# Altium PCB PCBv2.PcbDoc
Units mm, origin at the board's own origin, x right, y up, seen from the top; angles counter-clockwise.
Board outline 152.4 x 101.6 mm, 2 copper layers (Top Layer, Bottom Layer); 49 components, 33 nets, 199 pads, 0 vias.
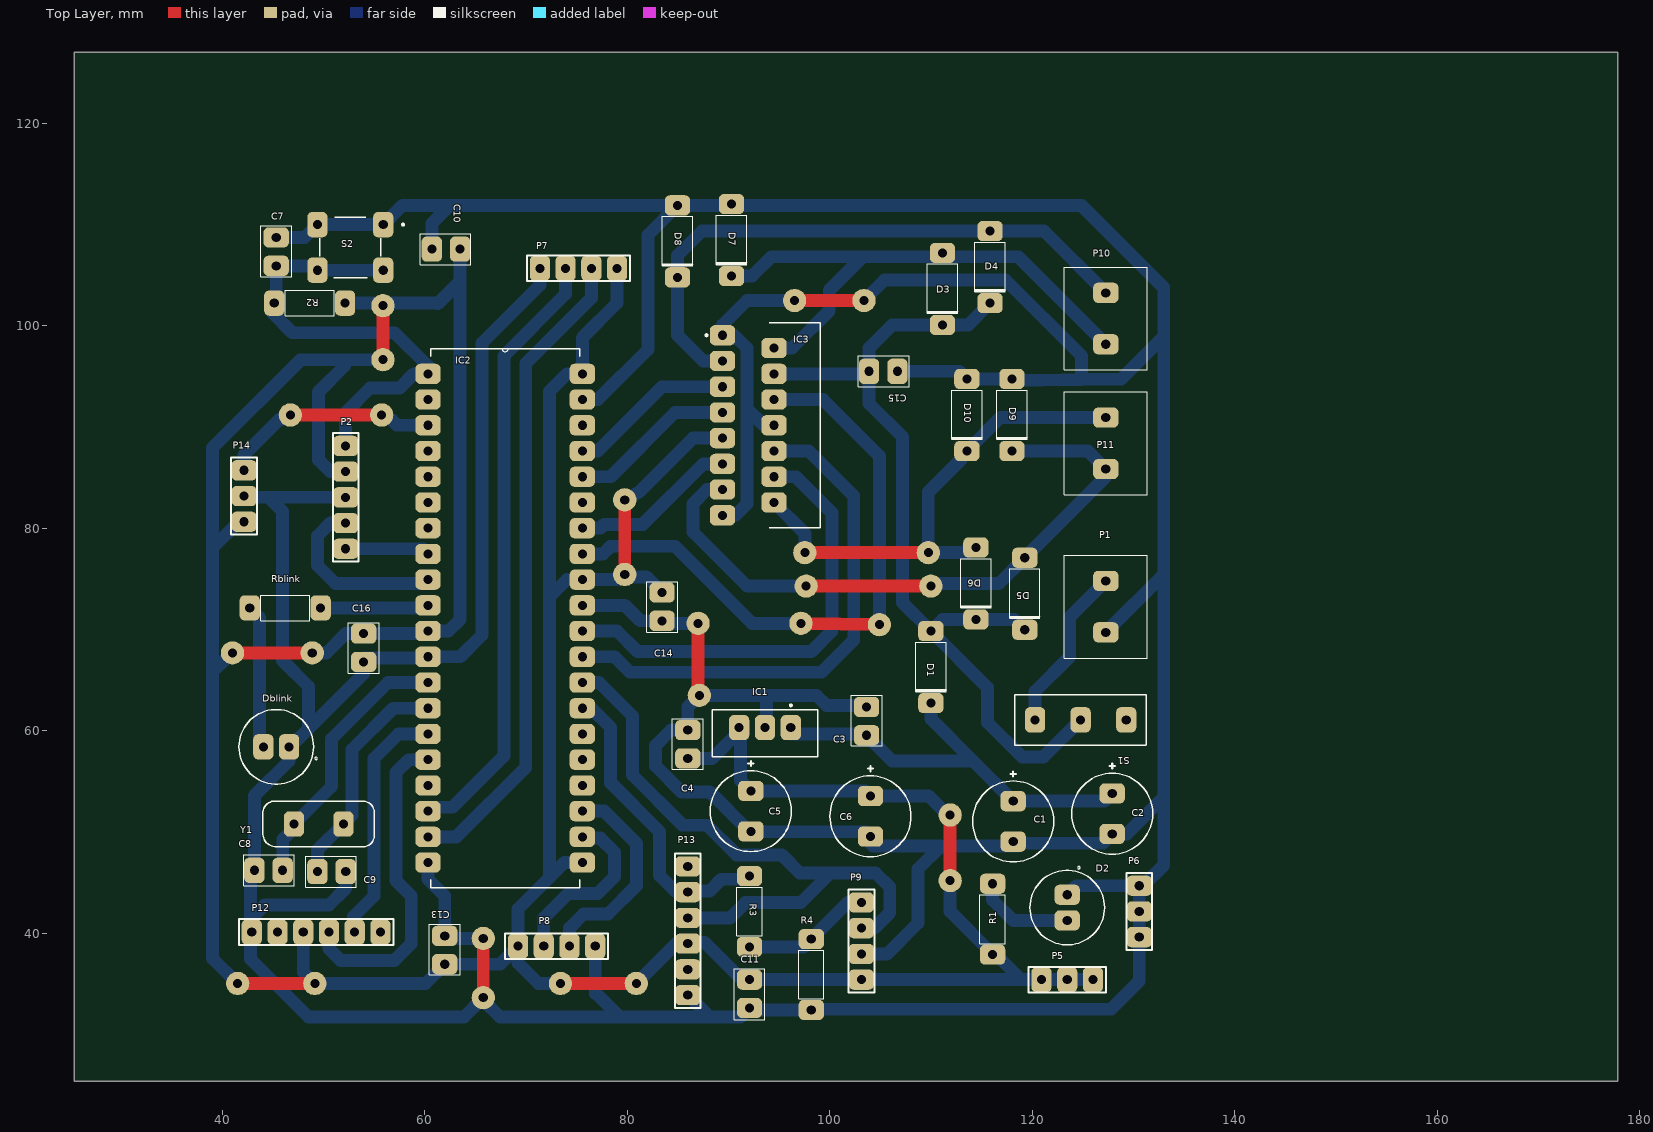
[diagram p0: Top Layer view]
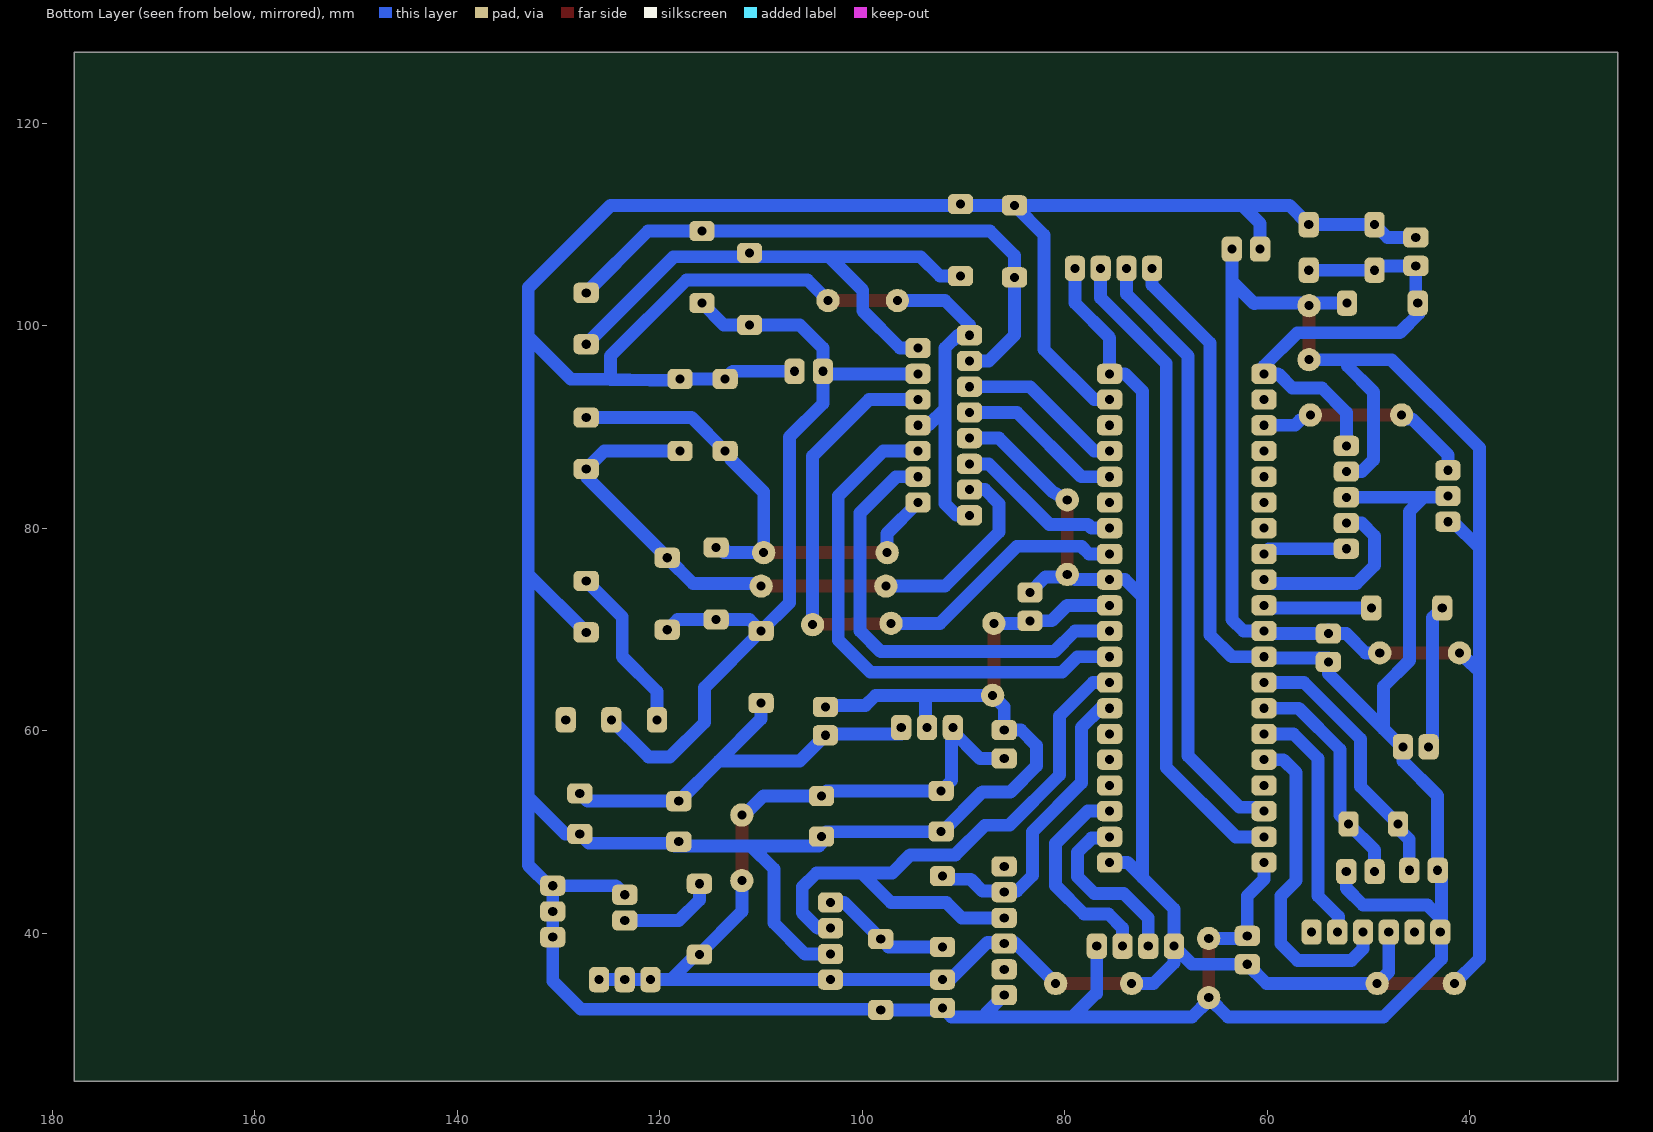
[diagram p1: Bottom Layer view, seen from below]

## Layer stack, top to bottom
Top Solder: solder mask 0.0102, Solder Resist, Dk 3.5
Top Layer: signal copper 0.0356
Dielectric 1: dielectric 0.32, FR-4, Dk 4.8
Bottom Layer: signal copper 0.0356
Bottom Solder: solder mask 0.0102, Solder Resist, Dk 3.5

## Board outline
25.4,25.4 177.8,25.4 177.8,127 25.4,127

## Design rules (kind name [scope] priority, off if disabled: settings)
Clearance [All] p1: gap=0.254 ignorepadtopadclearanceinfootprint=FALSE except(0: Arc-Hole Track-Hole SMDPad-Hole THPad-Hole Via-Hole Fill-Hole Poly-Hole Region-Hole Text-Hole)
PolygonConnect [All] p1: connectstyle=Relief reliefconductorwidth=0.254 reliefentries=4 polygonreliefangle="90 Angle" airgapwidth=0.254
RoutingVias [All] p1: holewidth=0.711 width=1.27 viastyle="Through Hole" minholewidth=0.711 minwidth=1.27 maxholewidth=0.711 maxwidth=1.27
SolderMaskExpansion [All] p1: expansion=0.102
Width [All] p1: maxlimit=1.27 minlimit=1.27 preferedwidth=1.27
30 further rules are at their usual default settings.

## Components (designator, comment, footprint, x,y, rotation, side; value= is the part's Value field where it differs from the comment)
C1 "Cap Pol1" elektrolit 118.11,51.054 r270 top value=470uF
C2 "Cap Pol1" elektrolit 127.889,51.816 r270 top value=470uF
C3 "Cap" keramicki 103.759,60.963 r270 top value=100nF
C4 "Cap" keramicki 86.106,58.671 r270 top value=100nF
C5 "Cap Pol1" elektrolit 92.202,52.07 r270 top value=470uF
C6 "Cap Pol1" elektrolit 104.013,51.562 r270 top value=470uF
C7 "Cap" keramicki 45.466,107.315 r270 top value=100nF
C8 "Cap" keramicki 44.577,46.101 r180 top value=33pF
C9 "Cap" keramicki 50.8,46.228 r0 top value=33pF
C10 "Cap" keramicki 62.103,107.696 r0 top value=100nF
C11 "Cap" keramicki 91.948,34.033 r90 top value=100nF
C13 "Cap" keramicki 62.103,38.357 r270 top value=100nF
C14 "Cap" keramicki 83.312,72.263 r90 top value=100nF
C15 "Cap" keramicki 105.283,95.377 r180 top value=100nF
C16 "Cap" keramicki 53.848,68.202 r90 top value=100nF
D1 "1N4007" DIOD 109.982,66.294 r270 top
D2 "LED0" led 123.444,42.545 r270 top
D3 "Diode 1N4007" DIOD 111.125,103.632 r270 top
D4 "Diode 1N4007" DIOD 115.824,105.791 r270 top
D5 "Diode 1N4007" DIOD 119.253,73.533 r270 top
D6 "Diode 1N4007" DIOD 114.427,74.549 r270 top
D7 "Diode 1N4007" DIOD 90.297,108.458 r270 top
D8 "Diode 1N4007" DIOD 84.963,108.331 r270 top
D9 "Diode 1N4007" DIOD 117.983,91.186 r270 top
D10 "Diode 1N4007" DIOD 113.538,91.186 r270 top
Dblink "LED0" led 45.339,58.42 r180 top
IC1 "L7805" stabilizator 96.149,60.325 r180 top
IC2 "dspic30f4013" dspic 75.565,46.99 r0 top
IC3 "L298N" l298n 89.408,99.06 r0 top
P1 "power" terminal2 127.254,74.803 r270 top
P2 "Programator" HDR1X5 52.197,88.138 r270 top
P5 "5V" HDR1X3 125.984,35.433 r180 top
P6 "GND" HDR1X3 130.556,39.624 r90 top
P7 "HC-SR04" HDR1X4 78.994,105.664 r180 top
P8 "HC-SR04" HDR1X4 69.215,38.735 r0 top
P9 "Bluetooth" HDR1X4 103.124,35.433 r90 top
P10 "motor1" terminal2 127.254,98.171 r90 top
P11 "motor2" terminal2 127.254,85.852 r90 top
P12 "FT232" HDR1X6 55.626,40.132 r180 top
P13 "FT232" HDR1X6 85.979,46.609 r270 top
P14 "Sharp" HDR1X3 42.164,80.645 r90 top
R1 "Res1" otp 116.078,41.402 r270 top value=510
R2 "Res1" otp 48.641,102.235 r0 top value=10K
R3 "Res1" otp 92.075,42.164 r90 top value=4K7
R4 "Res1" otp 98.171,35.941 r90 top value=10K
Rblink "Res1" otp 46.228,72.136 r0 top value=510
S1 "SW-SPST" Prekidac 120.269,61.087 r0 top
S2 "SW-PB" taster 52.653,107.732 r180 top
Y1 "XTAL" oscilator 49.53,50.8 r180 top

## Footprints (in the part's own frame and the unit in brackets; to place one, negate y for a bottom-side part, rotate by r counter-clockwise, add the part's x,y. Pads: shape width x height; smd on the part's side, far side on the other; paste and mask are expansions set on the pad)
DIOD [mm]
  rrect50% 2x2.5 hole 0.9: 1(-3.556,0) 2(3.556,0)
  silkscreen extent -2.46,-1.5 2.41,1.5
dspic [mm]
  rrect50% 2.5x2 hole 0.9: 1(-15.24,48.26) 2(-15.24,45.72) 3(-15.24,43.18) 4(-15.24,40.64) 5(-15.24,38.1) 6(-15.24,35.56) 7(-15.24,33.02) 8(-15.24,30.48) 9(-15.24,27.94) 10(-15.24,25.4) 11(-15.24,22.86) 12(-15.24,20.32) 13(-15.24,17.78) 14(-15.24,15.24) 15(-15.24,12.7) 16(-15.24,10.16) 17(-15.24,7.62) 18(-15.24,5.08) 19(-15.24,2.54) 20(-15.24,0) 21(0,0) 22(0,2.54) 23(0,5.08) 24(0,7.62) 25(0,10.16) 26(0,12.7) 27(0,15.24) 28(0,17.78) 29(0,20.32) 30(0,22.86) 31(0,25.4) 32(0,27.94) 33(0,30.48) 34(0,33.02) 35(0,35.56) 36(0,38.1) 37(0,40.64) 38(0,43.18) 39(0,45.72) 40(0,48.26)
  silkscreen extent -14.99,-2.49 -0.25,50.75
elektrolit [mm]
  rrect50% 2x2.5 hole 0.9: 1(-2,0) 2(2,0)
  silkscreen extent -4.95,-4 4,4
HDR1X3 [mm] "Connector; Header; 3 Position"
  rrect50% 2x2.5 hole 0.9: 1(0,0) 2(2.54,0) 3(5.08,0)
  silkscreen extent -1.27,-1.27 6.35,1.27
HDR1X4 [mm] "Connector; Header; 4 Position"
  rrect50% 2x2.5 hole 0.9: 1(0,0) 2(2.54,0) 3(5.08,0) 4(7.62,0)
  silkscreen extent -1.27,-1.27 8.89,1.27
HDR1X5 [mm] "Connector; Header; 5 Position"
  rrect50% 2x2.5 hole 0.9: 1(0,0) 2(2.54,0) 3(5.08,0) 4(7.62,0) 5(10.16,0)
  silkscreen extent -1.27,-1.27 11.43,1.27
HDR1X6 [mm] "Connector; Header; 6 Position"
  rrect50% 2x2.5 hole 0.9: 1(0,0) 2(2.54,0) 3(5.08,0) 4(7.62,0) 5(10.16,0) 6(12.7,0)
  silkscreen extent -1.27,-1.27 13.97,1.27
keramicki [mm]
  rrect50% 2x2.5 hole 0.9: 1(-1.4,-0.127) 2(1.4,-0.127)
  silkscreen extent -2.54,-1.65 2.46,1.4
l298n [mm]
  rrect50% 2.5x2 hole 0.9: 1(0,0) 2(5.08,-1.27) 3(0,-2.54) 4(5.08,-3.81) 5(0,-5.08) 6(5.08,-6.35) 7(0,-7.62) 8(5.08,-8.89) 9(0,-10.16) 10(5.08,-11.43) 11(0,-12.7) 12(5.08,-13.97) 13(0,-15.24) 14(5.08,-16.51) 15(0,-17.78)
  silkscreen extent -1.69,-18.99 9.63,1.21
led [mm]
  rrect50% 2x2.5 hole 0.9: 1(1.27,0) 2(-1.27,0)
  silkscreen extent -4.06,-3.68 3.68,3.68
oscilator [mm]
  rrect50% 2x2.5 hole 0.9: 1(-2.44,0) 2(2.44,0)
  silkscreen extent -5.5,-2.25 5.5,2.25
otp [mm]
  rrect50% 2x2.5 hole 0.9: 1(-3.5,0) 2(3.5,0)
  silkscreen extent -2.41,-1.25 2.41,1.25
Prekidac [mm]
  rrect50% 2x2.5 hole 0.9: 1(0,0) 2(4.5,0) 3(9,0)
  silkscreen extent -2,-2.5 11,2.5
stabilizator [mm]
  rrect50% 2x2.5 hole 0.9: 1(0,0) 2(2.55,0) 3(5.1,0)
  silkscreen extent -2.65,-2.29 7.75,2.86
taster [mm]
  rrect50% 2x2.5 hole 0.9: 1(-3.25,-2.25) 1(3.25,-2.25) 2(-3.25,2.25) 2(3.25,2.25)
  silkscreen extent -5.31,-3 3,3
terminal2 [mm]
  rrect50% 2x2.5 hole 0.9: 1(0,0) 2(5.08,0)
  silkscreen extent -2.54,-4.1 7.62,4.1

## Part data
C1 C2 C5 C6: "Polarized Capacitor (Radial)", LatestRevisionDate=17-Jul-2002, LatestRevisionNote="Re-released for DXP Platform.", PackageDescription="Polarized Capacitor (Radial); 2 Leads", PackageReference=RB7.6-15, Published=8-Jun-2000, Publisher="Altium Limited"
C3 C4 C7 C8 C9 C10 C11 C13 C14 C15 C16: "Capacitor", LatestRevisionDate=17-Jul-2002, LatestRevisionNote="Re-released for DXP Platform.", PackageDescription="Radial Cap, Thru-Hole; 2 Leads; 0.3 in Pin Spacing", PackageReference=RAD-0.3, Published=8-Jun-2000, Publisher="Altium Limited"
D1: library part "Diode 1N4007", "1 Amp General Purpose Rectifier", Code_JEDEC=DO-204-AL, ComponentLink1Description="Manufacturer Link", ComponentLink1URL=http://www.fairchildsemi.com/, ComponentLink2Description=Datasheet, ComponentLink2URL=http://www.fairchildsemi.com/ds/1N%2F1N4001.pdf, DatasheetVersion=1998, LatestRevisionDate=17-Jul-2002, LatestRevisionNote="Re-released for DXP Platform.", PackageDescription="Diode, Axial; Body 5.2 x 2.7 mm (LxDia. max), Lead Dia. 0.86 mm (max)", PackageReference=DO-41, PackageVersion=Aug-1999, Published=8-Jun-2000, Publisher="Altium Limited"
D2 Dblink: "Typical INFRARED GaAs LED", LatestRevisionDate=08-Jul-2005, LatestRevisionNote="Mech Layer 1 removed.", PackageDescription="LED; 2 Leads", PackageReference=LED-0, Published=8-Jun-2000, Publisher="Altium Limited"
D3 D4 D5 D6 D7 D8 D9 D10: "1 Amp General Purpose Rectifier", Code_JEDEC=DO-204-AL, ComponentLink1Description="Manufacturer Link", ComponentLink1URL=http://www.fairchildsemi.com/, ComponentLink2Description=Datasheet, ComponentLink2URL=http://www.fairchildsemi.com/ds/1N%2F1N4001.pdf, DatasheetVersion=1998, LatestRevisionDate=17-Jul-2002, LatestRevisionNote="Re-released for DXP Platform.", PackageDescription="Diode, Axial; Body 5.2 x 2.7 mm (LxDia. max), Lead Dia. 0.86 mm (max)", PackageReference=DO-41, PackageVersion=Aug-1999, Published=8-Jun-2000, Publisher="Altium Limited"
IC3: "Dual Full Bridge Motor Driver 15-Pin(15+Tab) MULTIWATT V Tube", Package=None, Availability=Unavailable, MP=L298N, Price=None
P1 P10 P11: library part "Header 2", "Header, 2-Pin", LatestRevisionDate=17-Jul-2002, LatestRevisionNote="Re-released for DXP Platform.", Publisher="Altium Limited"
P2 P5 P6 P9 P12 P13: library part "Header 6", "Header, 6-Pin", LatestRevisionDate=17-Jul-2002, LatestRevisionNote="Re-released for DXP Platform.", Publisher="Altium Limited"
P7 P8: library part "Header 4", "Header, 4-Pin", LatestRevisionDate=17-Jul-2002, LatestRevisionNote="Re-released for DXP Platform.", Publisher="Altium Limited"
P14: library part "Header 3", "Header, 3-Pin", LatestRevisionDate=17-Jul-2002, LatestRevisionNote="Re-released for DXP Platform.", Publisher="Altium Limited"
R1 R2 R3 R4 Rblink: "Resistor", LatestRevisionDate=17-Jul-2002, LatestRevisionNote="Re-released for DXP Platform.", PackageDescription="Axial Device, Thru-Hole; 2 Leads; 0.3 in Pin Spacing", PackageReference=AXIAL-0.3, Published=8-Jun-2000, Publisher="Altium Limited"
S1: "Single-Pole, Single-Throw Switch", LatestRevisionDate=17-Jul-2002, LatestRevisionNote="Re-released for DXP Platform.", PackageDescription="Switch; 2 Leads", PackageReference=SPST-2, Published=24-Mar-1999, Publisher="Altium Limited"
S2: "Switch", LatestRevisionDate=17-Jul-2002, LatestRevisionNote="Re-released for DXP Platform.", PackageDescription="Switch; 2 Leads", PackageReference=SPST-2, Published=24-Mar-1999, Publisher="Altium Limited"
Y1: "Crystal Oscillator", LatestRevisionDate=17-Jul-2002, LatestRevisionNote="Re-released for DXP Platform.", PackageDescription="Crystal, Thru-Hole; 2 Leads; Body 3.1 x 8.2 mm (Dia.xH)", PackageReference=R38, Published=8-Jun-2000, Publisher="Altium Limited"

## Free pads (board coordinates)
  round 2.3 hole 0.9: 2(41.021,67.691) 2(41.529,35.052) 2(46.736,91.186) 2(48.895,67.691) 2(49.149,35.052) 2(55.753,91.186) 2(55.88,96.647) 2(55.88,101.981) 2(65.786,33.655) 2(65.786,39.497) 2(73.406,35.052) 2(79.756,75.438) 2(79.756,82.804) 2(80.899,35.052) 2(86.995,70.612) 2(87.122,63.5) 2(96.52,102.489) 2(97.155,70.612) 2(97.536,77.597) 2(97.663,74.295) 2(103.378,102.489) 2(104.902,70.485) 2(109.728,77.597) 2(109.982,74.295) 2(111.887,45.212) 2(111.887,51.689)

## Nets (pads, with @x,y where several pads share a name; then routed paths per layer and width w, separated by ;. In a path a pad name is that pad's centre, name@x,y a point inside that pad or via, vN(x,y) a via of type N, cw(c..) or ccw(c..) an arc to the next point about the centre after c; other vN are vias at no path point)
5V: C4.2 C5.1 C6.1 C10.2 C11.2 C13.2 C14.2 C16.2 IC1.3 IC2.11 IC2.21 IC2.32 IC2.40 IC3.9 P2.2 P5.1 P5.2 P5.3 P7.1 P8.1 P9.1 P12.4 P13.4 P14.1 pad.2@41.021,67.691 pad.2@41.529,35.052 pad.2@48.895,67.691 pad.2@49.149,35.052 pad.2@55.88,96.647 pad.2@55.88,101.981 pad.2@73.406,35.052 pad.2@79.756,75.438 pad.2@79.756,82.804 pad.2@80.899,35.052 pad.2@111.887,45.212 pad.2@111.887,51.689 R1.2 R2.2 | length 431.1
  Top Layer w1.27: pad.2@41.021,67.691 pad.2@48.895,67.691 ; pad.2@41.529,35.052 pad.2@49.149,35.052 ; pad.2@55.88,96.647 pad.2@55.88,101.981 ; pad.2@73.406,35.052 pad.2@80.899,35.052 ; pad.2@79.756,75.438 pad.2@79.756,82.804 ; pad.2@111.887,45.212 pad.2@111.887,51.689
  Bottom Layer w1.27: pad.2@41.021,67.691 39.052,65.916 ; pad.2@41.529,35.052 39.052,37.529 39.052,65.916 ; P14.1 41.656,80.645 39.052,78.041 ; P12.4 48.006,36.195 49.149,35.052 60.071,35.052 C13.2 67.437,36.957 P8.1 ; pad.2@48.895,67.691 50.292,67.691 52.203,69.602 C16.2 ; 52.07,96.266 52.07,96.012 49.53,93.472 49.53,86.741 50.673,85.598 P2.2 ; R2.2 61.214,102.235 61.279,102.17 63.503,104.394 ; C16.2@53.975,69.98 54.359,69.596 60.071,69.596 IC2.11 62.357,69.85 63.5,70.993 63.5,96.774 63.503,96.777 63.503,104.394 ; pad.2@55.88,96.647 47.752,96.647 39.052,87.947 39.052,78.041 ; C10.2 63.503,104.394 ; pad.2@73.279,35.179 73.406,35.052 71.247,35.052 69.215,37.084 P8.1 ; IC2.21 73.787,46.99 72.326,45.529 ; P7.1 78.994,102.235 75.565,98.806 IC2.40 74.041,95.25 72.326,93.535 72.326,73.215 ; pad.2@79.756,82.804 81.153,83.566 86.487,88.9 IC3.9 IC3.9@89.281,88.773 ; pad.2@80.899,35.052 84.963,39.116 87.63,39.116 91.313,35.433 C11.2 P9.1 118.872,35.433 ; C14.2 81.918,75.184 79.828,75.184 79.756,75.438 78.994,74.93 IC2.32 74.041,74.93 72.326,73.215 ; C4.2 88.386,57.271 91.186,60.071 91.186,55.086 C5.1 103.505,54.07 C6.1 109.76,53.562 pad.2@111.76,51.562 ; pad.2@111.887,44.958 111.887,42.164 116.078,37.973 R1.2 116.403,37.902 118.872,35.433 ; P5.1 P5.2 P5.3 118.872,35.433 ; 39.052,65.916 39.052,78.041 ; P8.1 69.215,42.418 72.326,45.529 ; 72.326,45.529 72.326,73.215
EnA: IC2.33 IC3.6 pad.2@97.155,70.612 pad.2@104.902,70.485 | length 62.2
  Top Layer w1.27: pad.2@97.155,70.612 pad.2@104.902,70.485
  Bottom Layer w1.27: IC2.33 77.597,77.47 78.359,78.232 84.709,78.232 92.329,70.612 pad.2@97.155,70.612 ; IC3.6 99.314,92.71 104.902,87.122 pad.2@104.902,70.485
EnB: IC2.34 IC3.11 | length 16.5
  Bottom Layer w1.27: IC2.34 77.343,80.01 77.724,80.391 81.534,80.391 87.503,86.36 IC3.11
GND: C1.2 C2.2 C3.1 C4.1 C5.2 C6.2 C7.1 C8.2 C9.2 C10.1 C11.1 C13.1 C14.1 C15.1 C16.1 D2.2 D7.1 D8.1 D9.1 D10.1 Dblink.2 IC1.2 IC2.12 IC2.20 IC2.31 IC2.39 IC3.1 IC3.8 IC3.15 P1.2 P2.3 P6.1 P6.2 P6.3 P7.4 P8.4 P9.2 P12.6 P13.6 P14.2 pad.2@65.786,33.655 pad.2@65.786,39.497 pad.2@86.995,70.612 pad.2@87.122,63.5 pad.2@96.52,102.489 pad.2@103.378,102.489 R4.1 S2.1 | length 676.6
  Top Layer w1.27: pad.2@65.786,33.655 pad.2@65.786,39.497 ; pad.2@86.995,70.612 86.995,63.373 pad.2@87.122,63.5 ; pad.2@96.52,102.489 pad.2@103.378,102.489
  Bottom Layer w1.27: P14.2 42.291,83.058 44.577,83.058 ; C7.1 48.136,108.715 49.403,109.982 55.903,109.982 57.808,111.887 62.484,111.887 ; P2.3 44.577,83.058 ; C9.2 52.2,44.453 50.546,42.799 44.196,42.799 42.799,41.402 ; IC2.20 60.325,45.339 61.976,43.688 C13.1 62.236,39.497 pad.2@65.786,39.497 ; C10.1 60.703,110.106 62.484,111.887 ; P7.4 71.374,104.013 65.659,98.298 65.659,69.469 63.5,67.31 IC2.12 60.195,67.18 53.975,67.18 C16.1 53.975,65.659 48.514,60.198 ; IC2.31 79.756,72.39 81.283,70.863 C14.1 83.69,70.612 pad.2@86.995,70.612 ; IC2.39 77.089,92.71 82.042,97.663 82.042,108.966 D8.1 ; P8.4 76.835,34.036 76.962,34.036 79.248,31.75 ; P13.6 87.757,32.131 87.757,31.75 ; IC3.15 90.678,81.28 91.821,82.423 91.821,91.821 ; C11.1@91.948,32.441 R4.1 98.242,32.512 127.762,32.512 130.556,35.306 P6.1 P6.2 P6.3 ; C11.1 91.192,31.75 87.757,31.75 ; 93.736,61.595 93.736,62.855 ; IC3.8 93.472,90.17 91.821,91.821 ; pad.2@96.52,102.489 91.821,102.489 89.408,100.076 IC3.1 90.551,99.06 91.821,97.79 91.821,91.821 ; P9.2 105.664,37.973 108.712,41.021 108.712,46.355 110.998,48.641 ; pad.2@103.378,102.489 105.41,104.521 117.348,104.521 124.842,97.027 124.842,94.679 ; C3.1@103.505,62.49 99.689,62.49 98.679,63.5 87.122,63.5 85.979,62.357 C4.1 84.328,60.071 82.804,58.547 82.804,56.515 85.344,53.975 88.138,53.975 92.075,50.038 103.537,50.038 C6.2 104.013,48.895 104.267,48.641 110.998,48.641 ; C15.1 112.776,95.504 D10.1 D9.1 118.11,94.615 120.904,94.615 124.842,94.679 ; D2.2 124.333,44.704 P6.3 ; P1.2 132.969,75.438 ; 42.799,41.402 42.799,37.465 48.514,31.75 63.881,31.75 65.786,33.655 65.786,33.401 67.437,31.75 79.248,31.75 ; 42.799,41.402 42.799,45.85 C8.2 43.177,53.594 46.609,57.026 Dblink.2 46.609,58.547 46.863,58.547 48.514,60.198 ; 44.577,83.058 45.974,81.661 45.974,66.929 48.514,64.389 48.514,60.198 ; 62.484,111.887 D8.1 ; 79.248,31.75 87.757,31.75 ; D8.1 124.841,111.887 132.969,103.759 132.969,98.933 ; 110.998,48.641 118.523,48.641 118.777,48.895 126.968,48.895 C2.2 129.318,49.816 132.969,53.467 ; 124.842,94.679 128.778,94.742 132.969,98.933 ; P6.3 130.937,44.704 132.969,46.736 132.969,53.467 ; 132.969,53.467 132.969,75.438 ; 132.969,75.438 132.969,98.933
In1: IC2.37 IC3.5 | length 16.5
  Bottom Layer w1.27: IC2.37 77.089,87.63 83.439,93.98 IC3.5
In2: IC2.36 IC3.7 | length 16.5
  Bottom Layer w1.27: IC2.36 78.359,85.09 84.709,91.44 IC3.7
In3: IC2.29 IC3.10 | length 52.7
  Bottom Layer w1.27: IC2.29 78.74,67.31 80.264,65.786 99.187,65.786 102.362,68.961 102.362,83.185 97.917,87.63 IC3.10
In4: IC2.30 IC3.12 | length 45.2
  Bottom Layer w1.27: IC2.30 78.994,69.85 81.026,67.818 98.171,67.818 100.203,69.85 100.203,81.534 96.647,85.09 IC3.12
INT1: IC2.23 P8.3 | length 21
  Bottom Layer w1.27: P8.3 74.295,40.513 75.692,41.91 78.105,41.91 80.899,44.704 80.899,48.895 77.724,52.07 IC2.23
INT2: IC2.18 P7.3 | length 60.4
  Bottom Layer w1.27: IC2.18 60.706,52.451 62.738,52.451 67.818,57.531 67.818,97.028 73.914,103.124 P7.3
MCLR: C7.2 IC2.1 P2.1 R2.1 S2.2 | length 46.8
  Bottom Layer w1.27: P2.1 52.197,91.44 54.61,93.853 57.531,93.853 58.928,95.25 IC2.1 60.325,96.012 57.023,99.314 46.919,99.314 45.014,101.219 45.339,101.544 C7.2 48.97,105.915 49.403,105.482 S2.2@55.903,105.482
NetC1_1: C1.1 C2.1 C3.2 D1.2 IC1.1 | length 42.2
  Bottom Layer w1.27: IC1.1@96.149,59.69 103.505,59.69 C3.2 106.172,57.023 114.141,57.023 ; D1.2 109.982,61.182 114.141,57.023 ; C2.1 127.127,53.054 C1.1 114.141,57.023
NetD2_1: D2.1 R1.1 | length 9
  Bottom Layer w1.27: R1.1 116.078,43.307 118.11,41.275 D2.1@122.682,41.275
NetDblink_1: Dblink.1 Rblink.1 | length 14.3
  Bottom Layer w1.27: Rblink.1 43.688,71.176 43.688,58.801 Dblink.1
NetP1_1: P1.1 S1.1 | length 16.6
  Bottom Layer w1.27: S1.1 120.269,63.881 123.698,67.31 123.698,71.247 P1.1
NetP9_4: P9.4 R3.1 R4.2 | length 12.9
  Bottom Layer w1.27: R3.1 97.394,38.664 R4.2 101.783,43.053 P9.4
OSC1: C8.1 IC2.13 Y1.2 | length 26.8
  Bottom Layer w1.27: C8.1 45.977,49.279 47.09,50.392 Y1.2 50.8,54.51 50.8,59.182 56.388,64.77 IC2.13
OSC2: C9.1 IC2.14 Y1.1 | length 22.8
  Bottom Layer w1.27: C9.1 49.4,48.23 Y1.1 52.832,51.662 52.832,58.166 56.896,62.23 IC2.14 IC2.14@60.198,62.357
Out1: D3.1 D7.2 IC3.2 P10.1 | length 55
  Bottom Layer w1.27: D7.2 92.329,104.902 94.234,106.807 103.251,106.807 ; IC3.2 96.266,97.79 99.949,101.473 99.949,103.505 103.251,106.807 ; P10.1 118.618,106.807 103.251,106.807
Out2: D4.1 D8.2 IC3.3 P10.2 | length 59.2
  Bottom Layer w1.27: IC3.3 87.503,96.52 84.963,99.06 D8.2 84.963,106.934 87.376,109.347 D4.1 121.158,109.347 P10.2
Out3: D5.1 D9.2 IC3.13 P11.1 pad.2@97.663,74.295 pad.2@109.982,74.295 | length 64.5
  Top Layer w1.27: pad.2@97.663,74.295 pad.2@109.982,74.295
  Bottom Layer w1.27: IC3.13 87.884,83.82 86.487,82.423 86.487,79.629 91.821,74.295 pad.2@97.663,74.295 ; pad.2@109.982,74.295 110.236,74.549 116.713,74.549 D5.1 127.254,85.09 P11.1 125.476,87.63 D9.2
Out4: D6.1 D10.2 IC3.14 P11.2 pad.2@97.536,77.597 pad.2@109.728,77.597 | length 49.5
  Top Layer w1.27: pad.2@97.536,77.597 pad.2@109.728,77.597
  Bottom Layer w1.27: IC3.14 97.536,79.502 pad.2@97.536,77.597 ; D6.1@113.665,78.105 113.665,77.597 109.728,77.597 109.728,83.566 113.03,86.868 113.03,87.122 D10.2 116.84,90.932 P11.2
PGC: IC2.8 P2.5 | length 8.3
  Bottom Layer w1.27: P2.5 59.817,77.978 IC2.8
PGD: IC2.9 P2.4 | length 18.1
  Bottom Layer w1.27: P2.4 50.673,80.518 49.403,79.248 49.403,76.327 51.181,74.549 59.944,74.549 IC2.9
RB1: IC2.3 P14.3 pad.2@46.736,91.186 pad.2@55.753,91.186 | length 21.1
  Top Layer w1.27: pad.2@46.736,91.186 pad.2@55.753,91.186
  Bottom Layer w1.27: P14.3@42.164,85.979 42.164,87.249 45.72,90.805 pad.2@46.609,90.805 ; pad.2@55.753,91.186 56.769,90.678 57.277,90.17 IC2.3
RB8: IC2.10 Rblink.2 | length 10.7
  Bottom Layer w1.27: Rblink.2 60.071,72.136 IC2.10
TRIG1: IC2.19 P7.2 | length 64.5
  Bottom Layer w1.27: IC2.19 63.119,49.53 69.977,56.388 69.977,96.266 76.454,102.743 P7.2
TRIG2: IC2.22 P8.2 | length 17.7
  Bottom Layer w1.27: P8.2 71.755,41.529 74.168,43.942 77.089,43.942 78.74,45.593 78.74,48.006 77.343,49.403 75.692,49.403 IC2.22
U1ARX: IC2.16 P12.3 | length 32.2
  Bottom Layer w1.27: P12.3 50.546,38.481 51.689,37.338 57.023,37.338 58.674,38.989 58.674,43.688 57.15,45.212 57.15,55.88 58.42,57.15 IC2.16
U1ATX: IC2.15 P12.2 | length 24.4
  Bottom Layer w1.27: P12.2 52.959,40.259 52.959,41.656 54.991,43.688 54.991,57.277 57.404,59.69 IC2.15
U2RX: IC2.28 P9.3 P13.3 | length 64
  Bottom Layer w1.27: IC2.28 77.216,64.77 80.518,61.468 80.518,55.626 85.471,50.673 87.884,50.673 90.805,47.752 95.25,47.752 97.028,45.974 100.076,45.974 ; P13.3 90.17,41.529 91.694,43.053 97.155,43.053 100.076,45.974 ; P9.3 104.394,40.513 105.918,42.037 105.918,44.577 104.521,45.974 100.076,45.974
U2TX: IC2.27 P13.2 R3.2 | length 29.3
  Bottom Layer w1.27: IC2.27 76.454,62.23 78.359,60.325 78.359,54.864 83.185,50.038 83.185,45.72 84.709,44.196 88.138,44.196 89.281,45.339 R3.2@91.242,45.339
VCC: C15.2 D1.1 D3.2 D4.2 D5.2 D6.2 IC3.4 S1.2 | length 87.3
  Bottom Layer w1.27: IC3.4 C15.2@103.883,95.25 ; D4.2 113.665,100.076 D3.2 106.172,100.076 103.883,97.787 C15.2 C15.2@103.883,95.25 ; D5.2 118.237,70.993 D6.2 111.125,70.993 D1.1 ; S1.2 121.086,57.404 118.999,57.404 115.57,60.833 115.57,64.262 D1.1 ; C15.2@103.883,95.25 103.883,92.332 107.188,89.027 107.188,72.644 D1.1
pads on no net: IC2.2 IC2.4 IC2.5 IC2.6 IC2.7 IC2.17 IC2.24 IC2.25 IC2.26 IC2.35 IC2.38 P12.1 P12.5 P13.1 P13.5 S1.3